# Altium PCB DAC_40MHz.PcbDoc
Units mil, origin at the board's own origin, x right, y up, seen from the top; angles counter-clockwise.
Board outline 3070.87 x 1850.39 mil, 2 copper layers (Top Layer, Bottom Layer); 57 components, 35 nets, 178 pads, 128 vias.
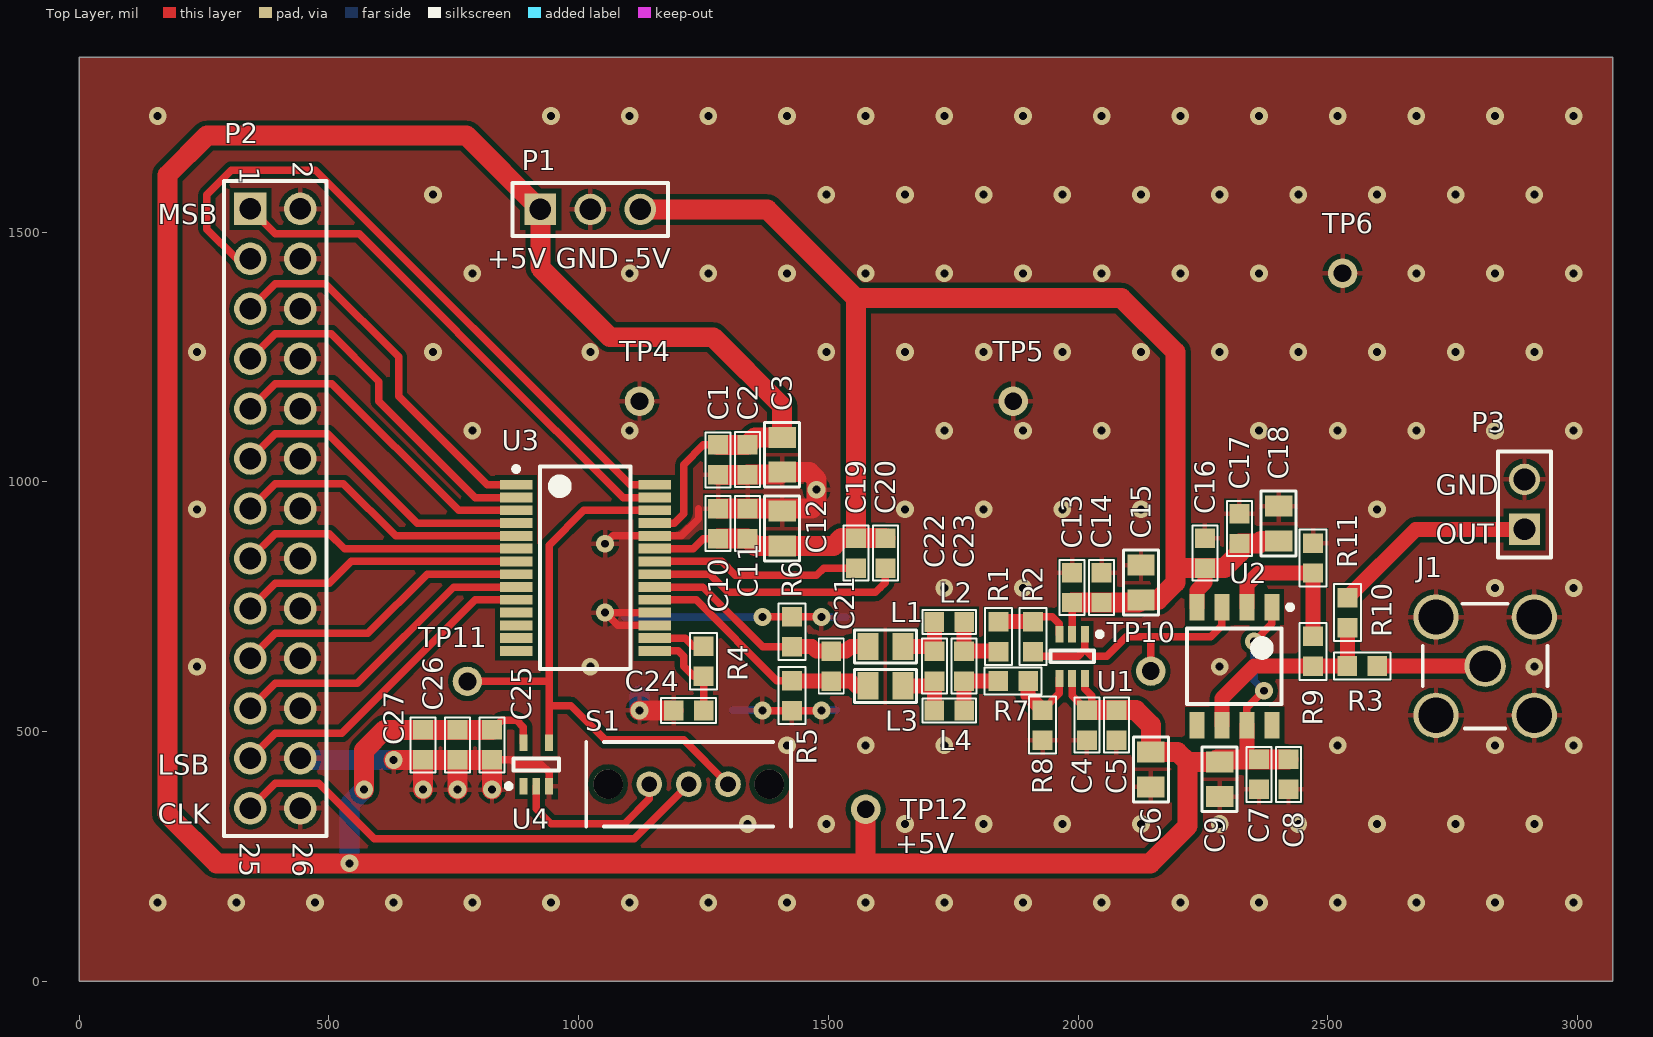
[diagram p0: Top Layer view]
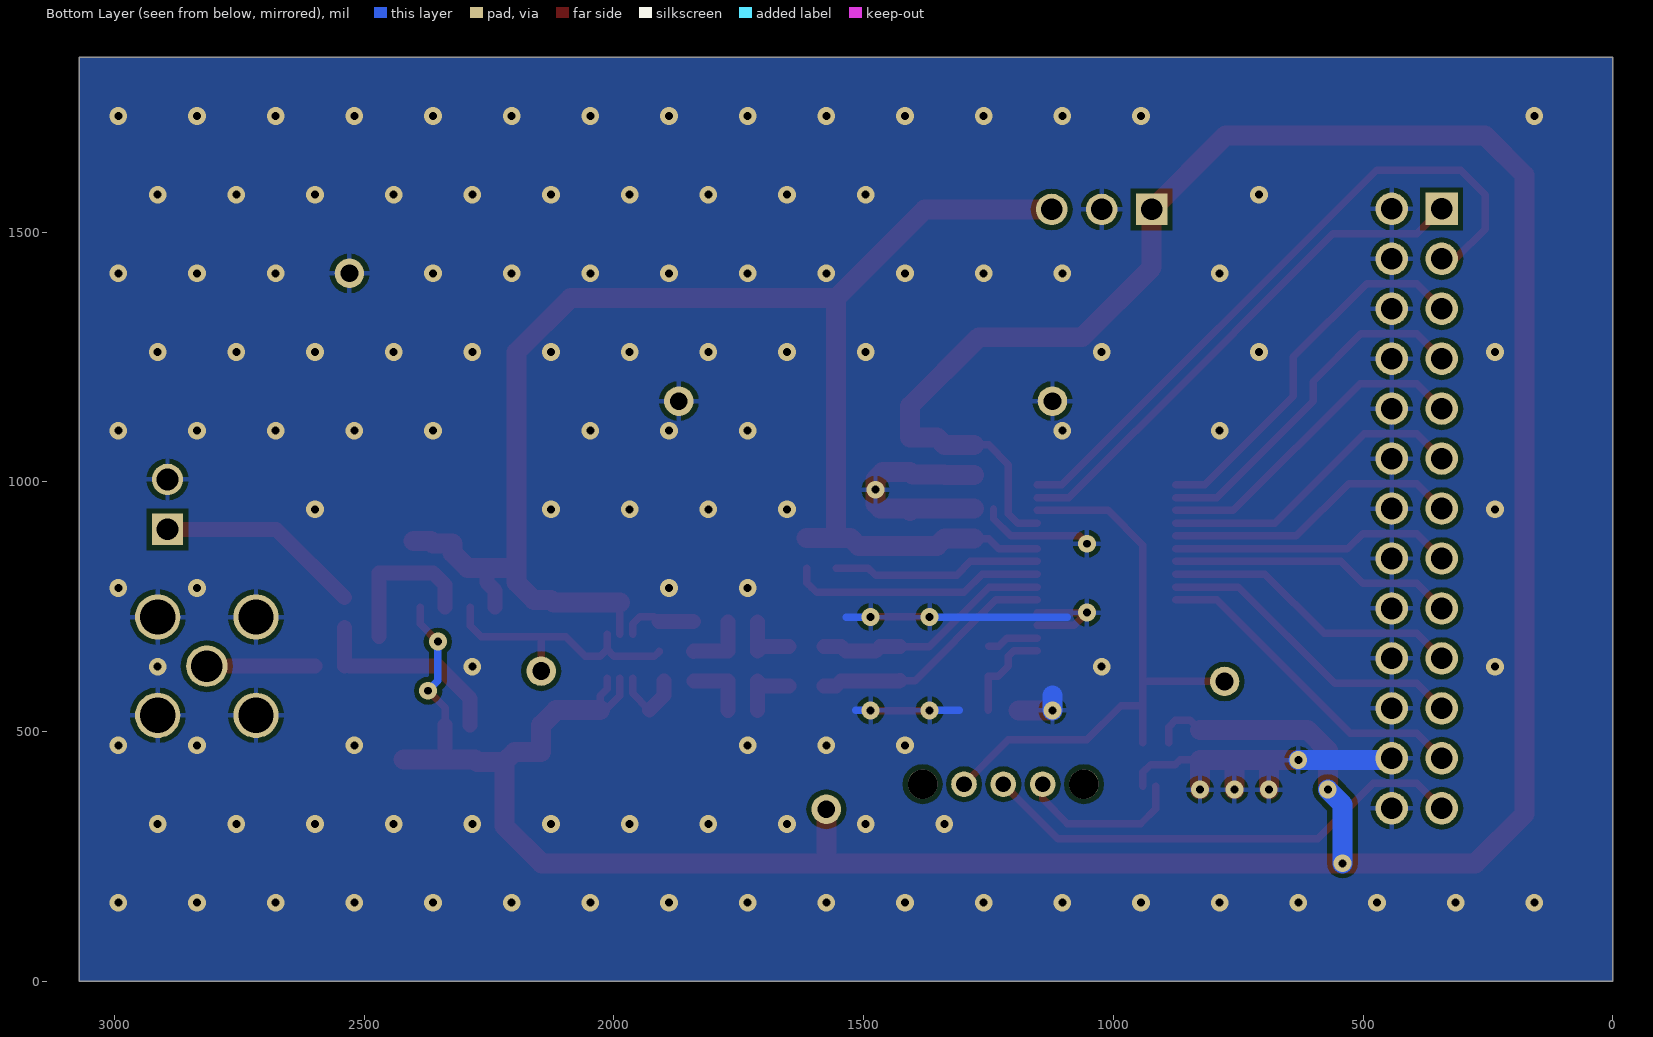
[diagram p1: Bottom Layer view, seen from below]
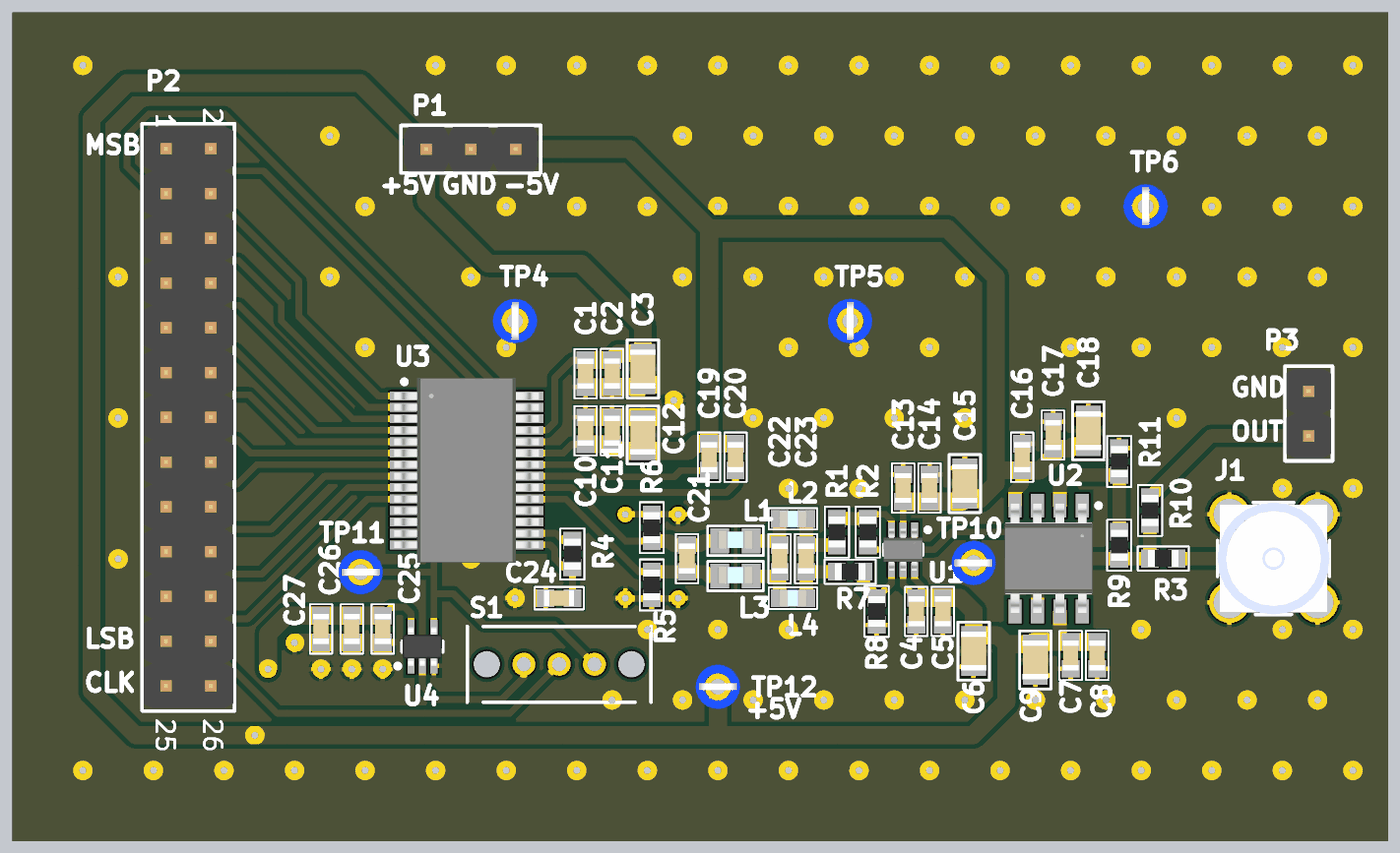
[diagram p2: 3D render of the assembled board from above, using the file's embedded part models]

## Layer stack, top to bottom
Top Solder: solder mask 0.4, Solder Resist, Dk 3.5
Top Layer: signal copper 1.4
Dielectric 1: dielectric 12.6, FR-4, Dk 4.8
Bottom Layer: signal copper 1.4
Bottom Solder: solder mask 0.4, Solder Resist, Dk 3.5

## Board outline
0,0 0,1850.39 3070.87,1850.39 3070.87,0

## Design rules (kind name [scope] priority, off if disabled: settings)
Clearance [All] p1: gap=10 ignorepadtopadclearanceinfootprint=TRUE except(0: Arc-Hole Track-Hole SMDPad-Hole THPad-Hole Via-Hole Fill-Hole Poly-Hole Region-Hole Text-Hole; 6: Arc-Arc Arc-Track Arc-SMDPad Track-Track Track-SMDPad SMDPad-SMDPad)
PolygonConnect [All] p1: connectstyle=Relief reliefconductorwidth=10 reliefentries=4 polygonreliefangle="90 Angle" airgapwidth=10
RoutingVias [All] p1: holewidth=15.75 width=35.43 viastyle="Through Hole" minholewidth=11.81 minwidth=31.5 maxholewidth=19.68 maxwidth=39.37
SolderMaskExpansion [All] p1: expansion=4
Width [All] p1: maxlimit=50 minlimit=6 preferedwidth=10 minimp=50.000000 maximp=50.000000 favimp=50.000000
30 further rules are at their usual default settings.

## Components (designator, comment, footprint, x,y, rotation, side; value= is the part's Value field where it differs from the comment)
C1 "Ceramic X5R" C_0603 1279.53,1043.83 r270 top value=100nF
C2 "Ceramic X5R" C_0603 1338.58,1044.3 r270 top value=1uF
C3 "Ceramic X5R" C_0805 1407.48,1054.14 r270 top value=10uF
C4 "Ceramic X5R" C_0603 2017.72,512.8 r270 top value=100nF
C5 "Ceramic X5R" C_0603 2076.77,512.8 r270 top value=1uF
C6 "Ceramic X5R" C_0805 2145.67,424.22 r270 top value=10uF
C7 "Ceramic X5R" C_0603 2362.2,414.38 r270 top value=100nF
C8 "Ceramic X5R" C_0603 2421.26,414.38 r270 top value=1uF
C9 "Ceramic X5R" C_0805 2283.46,404.53 r270 top value=10uF
C10 "Ceramic X5R" C_0603 1279.53,916.35 r270 top value=100nF
C11 "Ceramic X5R" C_0603 1338.58,916.35 r270 top value=1uF
C12 "Ceramic X5R" C_0805 1407.48,906.5 r270 top value=10uF
C13 "Ceramic X5R" C_0603 1988.19,788.39 r270 top value=100nF
C14 "Ceramic X5R" C_0603 2047.24,788.39 r270 top value=1uF
C15 "Ceramic X5R" C_0805 2125.98,798.24 r270 top value=10uF
C16 "Ceramic X5R" C_0603 2253.94,857.29 r270 top value=100nF
C17 "Ceramic X5R" C_0603 2322.83,906.5 r270 top value=1uF
C18 "Ceramic X5R" C_0805 2401.57,916.35 r270 top value=10uF
C19 "Ceramic X5R" C_0603 1555.12,857.29 r270 top value=100nF
C20 "Ceramic X5R" C_0603 1614.17,857.29 r270 top value=100nF
C21 "Ceramic C0G" C_0603 1505.91,630.91 r270 top value=56pF
C22 "Ceramic C0G" C_0603 1712.6,630.91 r270 top value=150pF
C23 "Ceramic C0G" C_0603 1771.65,630.91 r270 top value=150pF
C24 "Ceramic X5R" C_0603 1220.47,542.33 r180 top value=100nF
C25 "Ceramic X5R" C_0603 826.77,473.43 r270 top value=100nF
C26 "Ceramic X7R" C_0603 757.87,473.43 r270 top value=1nF
C27 "Ceramic X5R" C_0603 688.98,473.43 r270 top value=1uF
J1 "SMA vertical connector" J_SMA_VERTICAL 2814.96,630.91 r0 top value="=\"Manufacturer Part Number\""
L1 "Inductor" L_0805 1614.17,670.28 r0 top value=820nH
L2 "Inductor" L_0603 1742.13,719.5 r0 top value=1uH
L3 "Inductor" L_0805 1614.17,591.54 r0 top value=820nH
L4 "Inductor" L_0603 1742.13,542.33 r0 top value=1uH
P1 "Header 1x3, THT, 2,54mm" P_HEADER_1x3_THT_2.54_VERT 1023.62,1545.28 r0 top value="=\"Manufacturer Part Number\""
P2 "Header 2x13, THT, 2,54mm" P_HEADER_2x13_THT_2.54_VERT 392.91,946.46 r270 top value="=\"Manufacturer Part Number\""
P3 "Header 1x2, THT, 2,54mm" P_HEADER_1x2_THT_2.54_VERT 2893.7,954.72 r90 top value="=\"Manufacturer Part Number\""
R1 "Resistor" R_0603 1840.55,689.97 r90 top value=1k
R2 "Resistor" R_0603 1909.45,689.97 r270 top value=3.9k
R3 "Resistor" R_0603 2568.9,630.91 r0 top value=50R
R4 "Resistor" R_0603 1250,640.76 r270 top value=2k
R5 "Resistor" R_0603 1427.17,571.86 r90 top value=56R
R6 "Resistor" R_0603 1427.17,699.81 r270 top value=56R
R7 "Resistor" R_0603 1870.08,601.38 r0 top value=1k
R8 "Resistor" R_0603 1929.13,512.8 r270 top value=3.9k
R9 "Resistor" R_0603 2470.47,660.44 r270 top value=1k
R10 "Resistor" R_0603 2539.37,738.19 r270 top value=0R
R11 "Resistor" R_0603 2470.47,847.45 r270 top value=1k
S1 "Single Pole Double Throw Slideswitch" S_SLIDESWITCH_SPDT 1220.47,394.69 r0 top value=OS102011MS2QN13
TP4 "Single pin" TP_1PIN 1122.05,1161.42 r0 top value="=\"Manufacturer Part Number\""
TP5 "Single pin" TP_1PIN 1870.08,1161.42 r0 top value="=\"Manufacturer Part Number\""
TP6 "Single pin" TP_1PIN 2529.53,1417.32 r0 top value="=\"Manufacturer Part Number\""
TP10 "Single pin" TP_1PIN 2145.67,621.07 r90 top value="=\"Manufacturer Part Number\""
TP11 "Single pin" TP_1PIN 777.56,600.39 r90 top value="=\"Manufacturer Part Number\""
TP12 "Single pin" TP_1PIN 1574.8,344.49 r90 top value="=\"Manufacturer Part Number\""
U1 "ADA4807" SC70-6_TSSOP6_2X1.25_MD 1988.19,650.6 r270 top
U2 "LT1809" S8_SOP8_SOIC8_SO8_4.9X3.9_MD 2312.99,630.91 r270 top
U3 "LTC1666" SSOP28_SOP28_SO28_SOIC8_10.2X5.29_MD 1013.78,827.76 r0 top
U4 "74AHC1G14" SOT23-5_2.05X2.13_MD 915.35,434.06 r90 top

## Footprints (in the part's own frame and the unit in brackets; to place one, negate y for a bottom-side part, rotate by r counter-clockwise, add the part's x,y. Pads: shape width x height; smd on the part's side, far side on the other; paste and mask are expansions set on the pad)
C_0603 [mil]
  rect 39x40 smd: 1(-30,0) 2(30,0)
  silkscreen extent -55,-25 55,25, body extent -33,-18 33,18, height 35
C_0805 [mil]
  rect 42x55 smd: 1(-35,0) 2(35,0)
  silkscreen extent -65,-35 65,35, body extent -43,-29 43,29, height 53
J_SMA_VERTICAL [mm] "Vertical SMA coaxial connector"
  round 2.1 hole 1.6: 1(0,0)
  round 2.3 hole 1.8: 2(-2.5,-2.5) 2(-2.5,2.5) 2(2.5,-2.5) 2(2.5,2.5)
  silkscreen extent -3.17,-3.17 3.17,3.17, body extent -3.17,-3.17 3.18,3.18, height 9.5
L_0603 [mil]
  rect 39x40 smd: 1(-30,0) 2(30,0)
  silkscreen extent -54,-24 54,24, body extent -31,-20 32,20, height 31
L_0805 [mil]
  rect 42x55 smd: 1(-35,0) 2(35,0)
  silkscreen extent -62,-33 62,33, body extent -39,-18 39,23, height 50
P_HEADER_1x2_THT_2.54_VERT [mm]
  rect 1.6x1.6 hole 1.1: 1(-1.27,0)
  round 1.6 hole 1.1: 2(1.27,0)
  silkscreen extent -2.69,-1.35 2.69,1.35, body extent -2.54,-1.27 2.54,1.27, height 8.57
P_HEADER_1x3_THT_2.54_VERT [mm]
  rect 1.6x1.6 hole 1.1: 1(-2.54,0)
  round 1.6 hole 1.1: 2(0,0) 3(2.54,0)
  silkscreen extent -3.96,-1.35 3.96,1.35, body extent -3.81,-1.27 3.81,1.27, height 8.57
P_HEADER_2x13_THT_2.54_VERT [mm]
  rect 1.65x1.65 hole 1.1: 1(-15.24,-1.27)
  round 1.65 hole 1.1: 2(-15.24,1.27) 3(-12.7,-1.27) 4(-12.7,1.27) 5(-10.16,-1.27) 6(-10.16,1.27) 7(-7.62,-1.27) 8(-7.62,1.27) 9(-5.08,-1.27) 10(-5.08,1.27) 11(-2.54,-1.27) 12(-2.54,1.27) 13(0,-1.27) 14(0,1.27) 15(2.54,-1.27) 16(2.54,1.27) 17(5.08,-1.27) 18(5.08,1.27) 19(7.62,-1.27) 20(7.62,1.27) 21(10.16,-1.27) 22(10.16,1.27) 23(12.7,-1.27) 24(12.7,1.27) 25(15.24,-1.27) 26(15.24,1.27)
  silkscreen extent -16.66,-2.62 16.66,2.62, body extent -16.51,-2.54 16.51,2.54, height 8.59
R_0603 [mil]
  rect 39x40 smd: 1(-30,0) 2(30,0)
  silkscreen extent -57,-27 57,27, body extent -34,-19 34,19, height 21
S8_SOP8_SOIC8_SO8_4.9X3.9_MD [mm] "SOP, 8-Leads, Body 4,90x3,90mm, Pitch 1,27mm, IPC Medium Density"
  rect 1.35x0.75 smd: 1(-3,1.905) 2(-3,0.635) 3(-3,-0.635) 4(-3,-1.905) 5(3,-1.905) 6(3,-0.635) 7(3,0.635) 8(3,1.905)
  silkscreen extent -3.12,-2.4 1.92,2.96, body extent -3.1,-2.5 3.1,2.5, height 1.76
S_SLIDESWITCH_SPDT [mm]
  round 1.3 hole 0.8: 1(-2,0) 2(0,0) 3(2,0)
  round 1.5 hole 1.5 unplated: 4(-4.1,0) 4(4.1,0)
  silkscreen extent -5.21,-2.15 5.21,2.15
SC70-6_TSSOP6_2X1.25_MD [mm] "TSOP, 6-Leads, Body 2,00x1,25mm, Pitch 0,65mm, IPC Medium Density"
  rect 0.85x0.4 smd: 1(-1.125,0.65) 2(-1.125,0) 3(-1.125,-0.65) 4(1.125,-0.65) 5(1.125,0) 6(1.125,0.65)
  silkscreen extent -1.25,-1.1 0.3,1.53, body extent -1.19,-1.1 1.19,1.11, height 1.1
SOT23-5_2.05X2.13_MD [mm] "SOT23, 5-Leads, Body 2,05x2,13mm, Pitch 0,65mm, IPC Medium Density"
  rect 0.85x0.4 smd: 1(-1.1,0.65) 2(-1.1,0) 3(-1.1,-0.65) 4(1.1,-0.65) 5(1.1,0.65)
  silkscreen extent -1.22,-1.15 0.3,1.52, body extent -1.1,-1.12 1.1,1.12, height 1.1
SSOP28_SOP28_SO28_SOIC8_10.2X5.29_MD [mm] "SOP, 28-Leads, Body 10,20x5,29mm, Pitch 0,65mm, IPC Medium Density"
  rect 1.65x0.5 smd: 1(-3.525,4.225) 2(-3.525,3.575) 3(-3.525,2.925) 4(-3.525,2.275) 5(-3.525,1.625) 6(-3.525,0.975) 7(-3.525,0.325) 8(-3.525,-0.325) 9(-3.525,-0.975) 10(-3.525,-1.625) 11(-3.525,-2.275) 12(-3.525,-2.925) 13(-3.525,-3.575) 14(-3.525,-4.225) 15(3.525,-4.225) 16(3.525,-3.575) 17(3.525,-2.925) 18(3.525,-2.275) 19(3.525,-1.625) 20(3.525,-0.975) 21(3.525,-0.325) 22(3.525,0.325) 23(3.525,0.975) 24(3.525,1.625) 25(3.525,2.275) 26(3.525,2.925) 27(3.525,3.575) 28(3.525,4.225)
  silkscreen extent -3.65,-5.15 2.3,5.15, body extent -4.1,-5.24 4.1,5.25, height 1.7
TP_1PIN [mm] "Testpoint; 1 Pin;"
  round 1.5 hole 0.9: 1(0,0)
  body extent -1.27,-1.27 1.27,1.27, height 4.89

## Part data
C1 C4 C7 C10 C13 C16 C19 C20 C24 C25: library part C_100nF_16V_X5R_0603_10, "Capacitor", Dielectric=X5R, Manufacturer=KEMET, Manufacturer Part Number=C0603C104K4PACTU, Tolerance=10%, Voltage=16V, HelpURL=http://www.farnell.com/datasheets/2750585.pdf?_ga=2.131384847.1622004241.1573469514-1370716462.1573297970, Part Number=C_100nF_16V_X5R_0603_10, SCH_Footprint=0603, Supplier 1=TME, Supplier 2="RS Components", Supplier 3=Farnell, Supplier 4=Mouser, Supplier 5=Digi-Key, Supplier Part Number 1=C0603C104K4PACTU, Supplier Part Number 3=2773120, Supplier Part Number 4=80-C0603C104K4P, Supplier Part Number 5=399-14941-1-ND
C2 C5 C8 C11 C14 C17 C27: library part C_1uF_10V_X5R_0603_10, "Capacitor", Dielectric=X5R, Manufacturer=KEMET, Manufacturer Part Number=C0603C105K8PACTU, Tolerance=10%, Voltage=10V, HelpURL=http://www.farnell.com/datasheets/2739653.pdf?_ga=2.68618001.1622004241.1573469514-1370716462.1573297970, Part Number=C_1uF_10V_X5R_0603_10, SCH_Footprint=0603, Supplier 1=TME, Supplier 2="RS Components", Supplier 3=Farnell, Supplier 4=Mouser, Supplier 5=Digi-Key, Supplier Part Number 3=9227776, Supplier Part Number 4=80-C0603C105K8P, Supplier Part Number 5=399-3118-1-ND
C3 C6 C9 C12 C15 C18: library part C_10uF_16V_X5R_0805_10, "Capacitor", Dielectric=X5R, Tolerance=10%, Voltage=16V, Part Number=C_10uF_16V_X5R_0805_10, SCH_Footprint=0805, Supplier 1=TME, Supplier 2="RS Components", Supplier 3=Farnell, Supplier 4=Mouser, Supplier 5=Digi-Key
C21: library part C_56pF_50V_C0G_0603_5, "Capacitor", Dielectric=C0G, Manufacturer=MULTICOMP, Manufacturer Part Number=MC0603N560J500CT, Tolerance=5%, Voltage=50V, HelpURL=http://www.farnell.com/datasheets/1870456.pdf?_ga=2.79548562.723038991.1573297970-1370716462.1573297970, Part Number=C_56pF_50V_C0G_0603_5, SCH_Footprint=0603, Supplier 1=TME, Supplier 2="RS Components", Supplier 3=Farnell, Supplier 4=Mouser, Supplier 5=Digi-Key, Supplier Part Number 3=1759063
C22 C23: library part C_150pF_50V_C0G_0603_5, "Capacitor", Dielectric=C0G, Manufacturer=KEMET, Manufacturer Part Number=C0603C151J5GACTU, Tolerance=5%, Voltage=50V, HelpURL=http://www.farnell.com/datasheets/2740964.pdf?_ga=2.103099776.1622004241.1573469514-1370716462.1573297970, Part Number=C_150pF_50V_C0G_0603_5, SCH_Footprint=0603, Supplier 1=TME, Supplier 2="RS Components", Supplier 3=Farnell, Supplier 4=Mouser, Supplier 5=Digi-Key, Supplier Part Number 3=1414615, Supplier Part Number 4=80-C0603C151J5G, Supplier Part Number 5=399-1063-1-ND
C26: library part C_1nF_50V_X7R_0603_10, "Capacitor", Dielectric=X7R, Manufacturer=MULTICOMP, Manufacturer Part Number=MCU0603R102KCT, Tolerance=10%, Voltage=50V, HelpURL=http://www.farnell.com/datasheets/2863930.pdf?_ga=2.60809645.1622004241.1573469514-1370716462.1573297970, Part Number=C_1nF_50V_X7R_0603_10, SCH_Footprint=0603, Supplier 1=TME, Supplier 2="RS Components", Supplier 3=Farnell, Supplier 4=Mouser, Supplier 5=Digi-Key, Supplier Part Number 3=9406174
J1: library part J_SMA_VERTICAL, Part Number=J_SMA_VERTICAL, SCH_Footprint=J_SMA_VERTICAL
L1 L3: library part L_820nH_180mA_0805, "Induction", Current=180mA, Manufacturer=MULTICOMP, Manufacturer Part Number=MCFT000127, Resistance=2.35R, HelpURL=http://www.farnell.com/datasheets/2861609.pdf?_ga=2.107285122.1622004241.1573469514-1370716462.1573297970, Part Number=L_820nH_180mA_0805, SCH_Footprint=0805, Supplier 1=TME, Supplier 2="RS Components", Supplier 3=Farnell, Supplier 4=Mouser, Supplier 5=Digi-Key, Supplier Part Number 3=1711846
L2 L4: library part L_1uH_100mA_0603, "Induction", Current=100mA, Manufacturer=BOURNS, Manufacturer Part Number=CS160808-1R0K, Resistance=500mR, HelpURL=http://www.farnell.com/datasheets/1727952.pdf?_ga=2.136259249.1622004241.1573469514-1370716462.1573297970, Part Number=L_1uH_100mA_0603, SCH_Footprint=0603, Supplier 1=TME, Supplier 2="RS Components", Supplier 3=Farnell, Supplier 4=Mouser, Supplier 5=Digi-Key, Supplier Part Number 3=2858948
P1: library part P_HEADER_1x3_THT_2.54_VERT, "Pin Header, THT, pitch 2.54mm, Single Row, Vertical, 3pin", Part Number=P_HEADER_1x3_THT_2.54_VERT, SCH_Footprint=P_HEADER_1x3_THT_2.54_VERT
P2: library part P_HEADER_2x13_THT_2.54_VERT, "Pin Header, THT, pitch 2.54mm, Dual Row, Vertical, 26pin", Part Number=P_HEADER_2x13_THT_2.54_VERT, SCH_Footprint=P_HEADER_2x13_THT_2.54_VERT
P3: library part P_HEADER_1x2_THT_2.54_VERT, "Pin Header, THT, pitch 2.54mm, Single Row, Vertical, 2pin", Part Number=P_HEADER_1x2_THT_2.54_VERT, SCH_Footprint=P_HEADER_1x2_THT_2.54_VERT
R1 R7 R9 R11: library part R_1k_0603_1, Manufacturer Part Number=MCWR06X1001FTL, Manufacturers=MULTICOMP, Power=100mW, Tolerance=1%, Voltage=50V, HelpURL=http://www.farnell.com/datasheets/2860681.pdf?_ga=2.62376492.1622004241.1573469514-1370716462.1573297970, Part Number=R_1k_0603_1, SCH_Footprint=0603, Supplier 1=TME, Supplier 2="RS Components", Supplier 3=Farnell, Supplier 4=Mouser, Supplier 5=Digi-Key, Supplier Part Number 3=2447272
R2 R8: library part R_3.9k_0603_1, Manufacturer Part Number=MCWR06X3901FTL, Manufacturers=MULTICOMP, Power=100mW, Tolerance=1%, Voltage=50V, HelpURL=http://www.farnell.com/datasheets/2860681.pdf?_ga=2.62376492.1622004241.1573469514-1370716462.1573297970, Part Number=R_3.9k_0603_1, SCH_Footprint=0603, Supplier 1=TME, Supplier 2="RS Components", Supplier 3=Farnell, Supplier 4=Mouser, Supplier 5=Digi-Key, Supplier Part Number 3=2447363
R3: library part R_50R_0603_1, Manufacturer Part Number=CRCW060350R0FKEA, Manufacturers=VISHAY, Power=100mW, Tolerance=1%, Voltage=75V, HelpURL=http://www.farnell.com/datasheets/2310790.pdf?_ga=2.127191693.1622004241.1573469514-1370716462.1573297970, Part Number=R_50R_0603_1, SCH_Footprint=0603, Supplier 1=TME, Supplier 2="RS Components", Supplier 3=Farnell, Supplier 4=Mouser, Supplier 5=Digi-Key, Supplier Part Number 3=2112878
R4: library part R_2k_0603_1, Power=100mW, Tolerance=1%, Voltage=50V, Part Number=R_2k_0603_1, SCH_Footprint=0603, Supplier 1=TME, Supplier 2="RS Components", Supplier 3=Farnell, Supplier 4=Mouser, Supplier 5=Digi-Key
R5 R6: library part R_56R_0603_1, Manufacturer Part Number=MCWF06P56R0FTL, Manufacturers=MULTICOMP, Power=100mW, Tolerance=1%, Voltage=50V, HelpURL=http://www.farnell.com/datasheets/2864032.pdf?_ga=2.132541966.1622004241.1573469514-1370716462.1573297970, Part Number=R_56R_0603_1, SCH_Footprint=0603, Supplier 1=TME, Supplier 2="RS Components", Supplier 3=Farnell, Supplier 4=Mouser, Supplier 5=Digi-Key, Supplier Part Number 3=2694086
R10: library part R_0R_0603_1, Power=100mW, Tolerance=1%, Voltage=50V, Part Number=R_0R_0603_1, SCH_Footprint=0603, Supplier 1=TME, Supplier 2="RS Components", Supplier 3=Farnell, Supplier 4=Mouser, Supplier 5=Digi-Key
S1: library part S_SLIDESWITCH_SPDT_OS102011MS2QN1, Manufacturer Part Number=OS102011MS2QN13, HelpURL=https://pl.mouser.com/datasheet/2/60/os-1382783.pdf, Part Number=S_SLIDESWITCH_SPDT_OS102011MS2QN1, SCH_Footprint=S_SPDT, Supplier 1=TME, Supplier 2="RS Components", Supplier 3=Farnell, Supplier 4=Mouser, Supplier 5=Digi-Key
TP4 TP5 TP6 TP10 TP11 TP12: library part TP_1PIN, "Testpoint", Component Type=Standard, Part Number=TP_1PIN, SCH_Footprint=Single, Supplier 1=TME, Supplier 2="RS Components", Supplier 3=Farnell, Supplier 4=Mouser, Supplier 5=Digi-Key
U1: library part U_ADA4807-1AKSZ-R2, Manufacturer="ANALOG DEVICES", HelpURL=https://www.analog.com/media/en/technical-documentation/data-sheets/ADA4807-1_4807-2_4807-4.pdf, Manufacturer Part Number=ADA4807, Part Number=U_ADA4807-1AKSZ-R2, SCH_Footprint=SC70-6, Supplier 1=TME, Supplier 2="RS Components", Supplier 3=Farnell, Supplier 4=Mouser, Supplier 5=Digi-Key
U2: library part U_LT1809CS8, Manufacturer="ANALOG DEVICES", HelpURL=https://www.analog.com/media/en/technical-documentation/data-sheets/180910fa.pdf, Manufacturer Part Number=LT1809, Part Number=U_LT1809CS8, SCH_Footprint=S8, Supplier 1=TME, Supplier 2="RS Components", Supplier 3=Farnell, Supplier 4=Mouser, Supplier 5=Digi-Key
U3: library part U_LTC1666, "12-bit 50Msps DAC", Manufacturer="ANALOG DEVICES", HelpURL=https://www.analog.com/media/en/technical-documentation/data-sheets/166678f.pdf, Manufacturer Part Number=LTC1666, Part Number=U_LTC1666, SCH_Footprint=SSOP28
U4: library part U_74AHC1G14, "Inverting Schmitt trigger", Manufacturer=NEXPERIA, HelpURL=http://www.farnell.com/datasheets/2014360.pdf?_ga=2.152704443.389134298.1573586833-761150148.1573586833, Manufacturer Part Number=74AHC1G14, Part Number=U_74AHC1G14, SCH_Footprint=TSSOP5

## Via types
v1: diameter 35.43, hole 15.75, Top Layer to Bottom Layer, 128 vias

## Nets (pads, with @x,y where several pads share a name; then routed paths per layer and width w, separated by ;. In a path a pad name is that pad's centre, name@x,y a point inside that pad or via, vN(x,y) a via of type N, cw(c..) or ccw(c..) an arc to the next point about the centre after c; other vN are vias at no path point)
+5V: C1.1 C2.1 C3.1 C4.1 C5.1 C6.1 C7.1 C8.1 C9.1 C25.1 C26.1 C27.1 P1.1 TP12.1 U1.5 U1.6 U2.1 U2.7 U3.25 U4.5 | length 7219.8
  Top Layer w15: C25.1 845.98,522.64 875.98,522.64 889.76,508.87 U4.5 ; U3.25 1191.93,917.33 1210.63,936.03 1210.63,1034.46 1250,1073.83 C1.1 ; U1.5 1988.19,571.86 2017.24,542.8 C4.1 2027.56,542.8 2027.56,571.86 2013.78,585.64 U1.6 ; U2.7 2337.99,547.64 v1(2372.05,581.7) ; v1(2352.36,680.13) 2387.99,715.76 U2.1
  Top Layer w30: U2.7 2337.99,448.9 C7.1@2342.52,444.38
  Top Layer w40: v1(570.87,383.86) 570.87,462.6 611.7,503.43 C27.1 C26.1 C25.1 ; C1.1 1338.11,1073.83 C2.1 1353.43,1089.14 C3.1 1407.48,1151.57 1269.68,1289.37 1062.99,1289.37 923.62,1428.74 P1.1 775.98,1692.91 255.91,1692.91 177.17,1614.17 177.17,334.65 275.59,236.22 v1(541.34,236.22) 1574.8,236.22 ; TP12.1 1574.8,236.22 ; C4.1@2027.56,542.8 C5.1 2115.67,542.8 2145.67,512.8 C6.1 2199.25,459.22 2218.94,439.53 ; C8.1 C7.1 2342.52,444.38 2278.46,444.38 2273.62,439.53 2218.94,439.53 ; 1574.8,236.22 2144.68,236.22 2218.94,310.48 2218.94,439.53
  Bottom Layer w15: v1(2352.36,680.13) 2352.36,601.39 v1(2372.05,581.7)
  Bottom Layer w40: v1(541.34,236.22) 541.34,354.33 v1(570.87,383.86)
-5V: C10.2 C11.2 C12.2 C13.2 C14.2 C15.2 C16.2 C17.2 C18.2 C19.1 C20.1 P1.3 U1.2 U2.4 U3.23 | length 3226.7
  Top Layer w15: U3.23 1229.33,866.15 1249.53,886.35 C10.2 ; U1.2 C13.2
  Top Layer w30: U2.4 2237.99,782.29 2253.94,798.24 C16.2
  Top Layer w40: P1.3 1377.95,1545.28 1555.12,1368.11 ; C10.2 C11.2 1353.43,871.5 C12.2 1510.28,871.5 1526.06,887.29 C19.1 ; C20.1 C19.1 ; C13.2 C14.2 2121.14,758.39 C15.2 2159.88,763.24 2194.88,798.24 2194.88,827.76 ; C18.2 2366.57,881.35 2361.73,876.5 C17.2 2322.83,857.29 2292.83,827.29 C16.2 2253.46,827.76 2194.88,827.76 ; C19.1 1555.12,1368.11 ; 1555.12,1368.11 2086.61,1368.11 2194.88,1259.84 2194.88,827.76
CLK: P2.25 S1.2 | length 989.5
  Top Layer w15: P2.25 392.89,396.44 480.14,396.44 591.14,285.43 1111.21,285.43 S1.2
CLK_DAC: S1.3 TP11.1 U3.26 U4.4 | length 1223.1
  Top Layer w15: TP11.1 940.95,600.39 ; U4.4 940.95,552.17 ; U3.26 1010.83,942.92 940.95,873.04 940.95,600.39 ; S1.3 1210.63,483.27 1053.15,483.27 984.25,552.17 940.95,552.17 ; 940.95,552.17 940.95,600.39
DB0: P2.23 U3.10 | length 663.5
  Top Layer w15: P2.23 392.93,496.48 526,496.48 793.31,763.79 U3.10
DB1: P2.21 U3.9 | length 632.7
  Top Layer w15: P2.21 392.93,596.48 557.11,596.48 750.01,789.38 U3.9
DB2: P2.19 U3.8 | length 601.9
  Top Layer w15: P2.19 392.93,696.48 578.37,696.48 696.86,814.97 U3.8
DB3: P2.17 U3.7 | length 571.1
  Top Layer w15: P2.17 392.93,796.48 501.2,796.48 545.28,840.56 U3.7
DB4: P2.15 U3.6 | length 565.3
  Top Layer w15: P2.15 392.89,896.44 501.2,896.44 531.49,866.15 U3.6
DB5: P2.13 U3.5 | length 596.2
  Top Layer w15: P2.13 392.89,996.44 529.15,996.44 633.85,891.74 U3.5
DB6: P2.11 U3.4 | length 627
  Top Layer w15: P2.11 392.89,1096.44 498.05,1096.44 677.16,917.33 U3.4
DB7: P2.9 U3.3 | length 657.8
  Top Layer w15: P2.9 392.89,1196.44 506.32,1196.44 759.84,942.92 U3.3
DB8: P2.7 U3.2 | length 711.7
  Top Layer w15: P2.7 392.89,1296.44 504.74,1296.44 600.39,1200.79 600.39,1161.42 793.3,968.51 U3.2
DB9: P2.5 U3.1 | length 765.6
  Top Layer w15: P2.5 392.89,1396.44 493.33,1396.44 639.76,1250 639.76,1171.26 816.92,994.1 U3.1
DB10: P2.3 U3.28 | length 1358.5
  Top Layer w15: P2.3 315.35,1446.46 255.91,1505.91 255.91,1574.8 305.12,1624.02 473.43,1624.02 1103.35,994.1 U3.28
DB11: P2.1 U3.27 | length 1049
  Top Layer w15: P2.1 392.93,1496.44 560.65,1496.44 954.72,1102.36 955.72,1102.36 1089.57,968.51 U3.27
GND: C1.2 C2.2 C3.2 C4.2 C5.2 C6.2 C7.2 C8.2 C9.2 C10.1 C11.1 C12.1 C13.1 C14.1 C15.1 C16.1 C17.1 C18.1 C24.2 C25.2 C26.2 C27.2 J1.2 P1.2 P2.2 P2.4 P2.6 P2.8 P2.10 P2.12 P2.14 P2.16 P2.18 P2.20 P2.22 P2.24 P2.26 P3.2 R5.1 R6.1 R8.2 R11.1 TP4.1 TP5.1 TP6.1 U3.17 U3.18 U3.24 U4.3 | length 2363.4
  Top Layer w15: C25.2 866.61,443.43 875.98,434.06 925.2,434.06 940.95,418.31 U4.3 ; v1(1053.15,875.98) 1068.9,891.74 U3.24 1205.71,891.74 1240.16,926.19 1240.16,945.87 ; U3.17 1078.73,712.61 v1(1053.15,738.19) U3.18 ; v1(1368.11,542.33) 1368.58,541.86 R5.1 1485.75,541.86 v1(1486.22,542.33) ; v1(1368.11,729.34) 1368.58,729.81 R6.1 1485.75,729.81 v1(1486.22,729.34)
  Top Layer w40: v1(629.92,442.91) 630.44,443.43 C27.2 ; v1(688.98,383.86) C27.2 ; v1(757.87,383.86) C26.2 ; v1(826.77,383.86) C25.2 C26.2 ; v1(1122.05,542.33) C24.2 ; C10.1 C11.1 C12.1@1402.64,946.35 ; C1.2 1338.11,1013.83 C2.2 1402.64,1014.3 C3.2 1462.17,1019.14 1476.38,1004.93 v1(1476.38,984.25) 1476.38,955.72 1467.01,946.35 C12.1@1402.64,946.35 ; C12.1 C12.1@1402.64,946.35 ; C27.2 C26.2
  Bottom Layer w15: 1092.52,729.34 v1(1368.11,729.34) ; 1309.06,542.33 v1(1368.11,542.33) ; v1(1486.22,542.33) 1515.75,542.33 ; v1(1486.22,729.34) 1535.43,729.34
  Bottom Layer w40: P2.24 446.46,442.91 v1(629.92,442.91) ; v1(1122.05,542.33) 1122.05,571.86
  other v1: 157.48,157.48 314.96,157.48 472.44,157.48 629.92,157.48 787.4,157.48 944.88,157.48 1102.36,157.48 1259.84,157.48 1417.32,157.48 1574.8,157.48 1732.28,157.48 1889.76,157.48 2047.24,157.48 2204.72,157.48 2362.2,157.48 2519.68,157.48 2677.17,157.48 2834.65,157.48 2992.13,157.48 1338.58,314.96 1496.06,314.96 1653.54,314.96 1811.02,314.96 1968.5,314.96 2125.98,314.96 2283.46,314.96 2440.94,314.96 2598.42,314.96 2755.91,314.96 2913.39,314.96 1417.32,472.44 1574.8,472.44 1732.28,472.44 2519.68,472.44 2834.65,472.44 2992.13,472.44 236.22,629.92 1023.62,629.92 2283.46,629.92 2913.39,629.92 1732.28,787.4 1889.76,787.4 2834.65,787.4 2992.13,787.4 236.22,944.88 1653.54,944.88 1811.02,944.88 1968.5,944.88 2125.98,944.88 2598.42,944.88 787.4,1102.36 1102.36,1102.36 1732.28,1102.36 1889.76,1102.36 2047.24,1102.36 2362.2,1102.36 2519.68,1102.36 2677.17,1102.36 2834.65,1102.36 2992.13,1102.36 236.22,1259.84 708.66,1259.84 1023.62,1259.84 1496.06,1259.84 1653.54,1259.84 1811.02,1259.84 1968.5,1259.84 2125.98,1259.84 2283.46,1259.84 2440.94,1259.84 2598.42,1259.84 2755.91,1259.84 2913.39,1259.84 787.4,1417.32 1102.36,1417.32 1259.84,1417.32 1417.32,1417.32 1574.8,1417.32 1732.28,1417.32 1889.76,1417.32 2047.24,1417.32 2204.72,1417.32 2362.2,1417.32 2677.17,1417.32 2834.65,1417.32 2992.13,1417.32 708.66,1574.8 1496.06,1574.8 1653.54,1574.8 1811.02,1574.8 1968.5,1574.8 2125.98,1574.8 2283.46,1574.8 2440.94,1574.8 2598.42,1574.8 2755.91,1574.8 2913.39,1574.8 157.48,1732.28 944.88,1732.28 1102.36,1732.28 1259.84,1732.28 1417.32,1732.28 1574.8,1732.28 1732.28,1732.28 1889.76,1732.28 2047.24,1732.28 2204.72,1732.28 2362.2,1732.28 2519.68,1732.28 2677.17,1732.28 2834.65,1732.28 2992.13,1732.28
NetC19_2: C19.2 U3.22 | length 419.9
  Top Layer w15: U3.22 1286.42,840.56 1313.98,813 1476.38,813 1490.67,827.29 C19.2
NetC20_2: C20.2 U3.21 | length 513.9
  Top Layer w15: U3.21 1262.8,814.97 1299.21,778.55 1594.49,778.55 1604.33,788.39 1614.17,798.24 C20.2
NetC21_1: C21.1 L1.1 R6.2 U3.20 | length 483.7
  Top Layer w15: U3.20 1249.02,789.38 1368.58,669.81 R6.2
  Top Layer w30: R6.2 1467.01,669.81 1475.91,660.91 C21.1 1535.91,660.91 1545.28,670.28 L1.1
NetC21_2: C21.2 L3.1 R5.2 U3.19 | length 498
  Top Layer w15: U3.19 1235.24,763.79 1397.17,601.86 R5.2
  Top Layer w30: R5.2 1428.11,600.91 C21.2 1545.75,600.91 1555.12,591.54 L3.1
NetC22_1: C22.1 L1.2 L2.1 | length 125.4
  Top Layer w30: L1.2 1703.23,670.28 C22.1@1712.13,661.39 ; L2.1 C22.1@1712.13,661.39 ; C22.1 C22.1@1712.13,661.39
NetC22_2: C22.2 L3.2 L4.1 | length 126.1
  Top Layer w30: L3.2 1703.23,591.54 C22.2 1712.6,542.8 L4.1
NetC23_1: C23.1 L2.2 R1.1 | length 128.1
  Top Layer w30: L2.2 1772.13,661.38 C23.1 1839.61,660.91 R1.1
NetC23_2: C23.2 L4.2 R7.1 | length 127.4
  Top Layer w30: L4.2 1772.13,600.44 C23.2 1839.61,600.91 R7.1
NetC24_1: C24.1 R4.2 U3.15 | length 198.6
  Top Layer w15: U3.15 1199.8,661.42 1210.63,650.6 1210.63,630.91 1230.79,610.76 R4.2 1250.47,610.28 C24.1
NetJ1_1: J1.1 R3.2 | length 216.1
  Top Layer w30: R3.2 J1.1
NetP3_1: P3.1 R10.1 | length 410.9
  Top Layer w30: R10.1 2675.91,904.72 P3.1
NetR1_2: R1.2 R2.1 U1.3 | length 152.7
  Top Layer w15: R2.1 1919.29,729.81 1948.35,729.81 1962.6,715.56 U1.3
  Top Layer w30: R1.2 R2.1
NetR2_2: R2.2 TP10.1 U1.1 U2.3 | length 556.2
  Top Layer w15: R2.2@1909.45,660.44 R2.2 1918.82,650.6 2000,650.6 2013.78,664.38 ; U1.1 2013.78,664.38 ; TP10.1 2145.67,689.97 ; U2.3 2287.99,711.92 2266.04,689.97 2145.67,689.97 ; 2013.78,664.38 2027.56,650.6 2057.09,650.6 2096.46,689.97 2145.67,689.97
NetR3_1: R3.1 R9.2 R10.2 U2.6 | length 398.9
  Top Layer w30: U2.6 2287.99,566.54 2352.36,630.91 R3.1@2529.06,630.91 ; R3.1 2538.9,707.72 R10.2
NetR4_1: R4.1 U3.16 | length 104.2
  Top Layer w15: U3.16 1213.58,687.01 1229.84,670.76 R4.1
NetR7_2: R7.2 R8.1 U1.4 | length 148
  Top Layer w15: R8.1 1962.6,576.27 U1.4
  Top Layer w30: R7.2 1900.08,571.86 R8.1
NetR9_1: R9.1 R11.2 U2.2 | length 314
  Top Layer w30: U2.2 2337.99,793.71 2361.73,817.45 R11.2 R9.1
NetS1_1: S1.1 U4.2 | length 333.8
  Top Layer w15: U4.2 915.35,345.48 944.88,315.95 1092.52,315.95 1141.73,365.16 S1.1
pads on no net: S1.4 U2.5 U2.8 U3.11 U3.12 U3.13 U3.14 U4.1

## Polygon pours and split planes (outlines as drawn)
GND on Top Layer "TOP_GND" (solid, pour order 2): 0,0 0,1850.39 3070.87,1850.39 3070.87,0
GND on Bottom Layer "BOT_GND" (solid, pour order 3): 0,0 0,1850.39 3070.87,1850.39 3070.87,0

## Silkscreen, mask and mechanical layers (free items; w line width, h text height)
Top Overlay:
  text "MSB" at 157.48,1515.75 h40
  text "+5V" at 816.93,1427.17 h40
  text "GND" at 954.72,1427.17 h40
  text "-5V" at 1092.52,1427.17 h40
  text "GND" at 2716.54,974.41 h40
  text "OUT" at 2716.54,875.98 h40
  text "LSB" at 157.48,413.39 h40
  text "CLK" at 157.48,314.96 h40
  text "+5V" at 1633.86,255.91 h40
Mechanical 1:
  the board outline again, w7.87

## Text inside footprints (layer, text, board x,y; h text height)
C1: Mechanical 17 "d" at 1274.53,1078.83 h10 r270; Mechanical 19 "-" at 1274.53,1078.83 h10 r270
C2: Mechanical 17 "d" at 1333.58,1079.3 h10 r270; Mechanical 19 "-" at 1333.58,1079.3 h10 r270
C3: Mechanical 17 "d" at 1402.48,1099.14 h15 r270; Mechanical 19 "-" at 1402.48,1099.14 h15 r270
C4: Mechanical 17 "d" at 2012.72,547.8 h10 r270; Mechanical 19 "-" at 2012.72,547.8 h10 r270
C5: Mechanical 17 "d" at 2071.77,547.8 h10 r270; Mechanical 19 "-" at 2071.77,547.8 h10 r270
C6: Mechanical 17 "d" at 2140.67,469.22 h15 r270; Mechanical 19 "-" at 2140.67,469.22 h15 r270
C7: Mechanical 17 "d" at 2357.2,449.38 h10 r270; Mechanical 19 "-" at 2357.2,449.38 h10 r270
C8: Mechanical 17 "d" at 2416.26,449.38 h10 r270; Mechanical 19 "-" at 2416.26,449.38 h10 r270
C9: Mechanical 17 "d" at 2278.46,449.53 h15 r270; Mechanical 19 "-" at 2278.46,449.53 h15 r270
C10: Mechanical 17 "d" at 1274.53,951.35 h10 r270; Mechanical 19 "-" at 1274.53,951.35 h10 r270
C11: Mechanical 17 "d" at 1333.58,951.35 h10 r270; Mechanical 19 "-" at 1333.58,951.35 h10 r270
C12: Mechanical 17 "d" at 1402.48,951.5 h15 r270; Mechanical 19 "-" at 1402.48,951.5 h15 r270
C13: Mechanical 17 "d" at 1983.19,823.39 h10 r270; Mechanical 19 "-" at 1983.19,823.39 h10 r270
C14: Mechanical 17 "d" at 2042.24,823.39 h10 r270; Mechanical 19 "-" at 2042.24,823.39 h10 r270
C15: Mechanical 17 "d" at 2120.98,843.24 h15 r270; Mechanical 19 "-" at 2120.98,843.24 h15 r270
C16: Mechanical 17 "d" at 2248.94,892.29 h10 r270; Mechanical 19 "-" at 2248.94,892.29 h10 r270
C17: Mechanical 17 "d" at 2317.83,941.5 h10 r270; Mechanical 19 "-" at 2317.83,941.5 h10 r270
C18: Mechanical 17 "d" at 2396.57,961.35 h15 r270; Mechanical 19 "-" at 2396.57,961.35 h15 r270
C19: Mechanical 17 "d" at 1550.12,892.29 h10 r270; Mechanical 19 "-" at 1550.12,892.29 h10 r270
C20: Mechanical 17 "d" at 1609.17,892.29 h10 r270; Mechanical 19 "-" at 1609.17,892.29 h10 r270
C21: Mechanical 17 "d" at 1500.91,665.91 h10 r270; Mechanical 19 "-" at 1500.91,665.91 h10 r270
C22: Mechanical 17 "d" at 1707.6,665.91 h10 r270; Mechanical 19 "-" at 1707.6,665.91 h10 r270
C23: Mechanical 17 "d" at 1766.65,665.91 h10 r270; Mechanical 19 "-" at 1766.65,665.91 h10 r270
C24: Mechanical 17 "d" at 1255.47,547.33 h10 r180; Mechanical 19 "-" at 1255.47,547.33 h10 r180
C25: Mechanical 17 "d" at 821.77,508.43 h10 r270; Mechanical 19 "-" at 821.77,508.43 h10 r270
C26: Mechanical 17 "d" at 752.87,508.43 h10 r270; Mechanical 19 "-" at 752.87,508.43 h10 r270
C27: Mechanical 17 "d" at 683.98,508.43 h10 r270; Mechanical 19 "-" at 683.98,508.43 h10 r270
J1: Mechanical 17 "d" at 2709.96,605.91 h40; Mechanical 19 "-" at 2714.96,610.91 h40
L1: Mechanical 17 "d" at 1571.17,659.28 h10; Mechanical 19 "-" at 1571.17,659.28 h10
L2: Mechanical 17 "d" at 1702.13,704.5 h10; Mechanical 19 "-" at 1702.13,704.5 h10
L3: Mechanical 17 "d" at 1571.17,580.54 h10; Mechanical 19 "-" at 1571.17,580.54 h10
L4: Mechanical 17 "d" at 1702.13,527.33 h10; Mechanical 19 "-" at 1702.13,527.33 h10
P1: Mechanical 17 "d" at 858.62,1605.28 h40; Mechanical 19 "-" at 858.62,1605.28 h40
P2: Mechanical 17 "d" at 502.91,1611.46 h40 r270; Mechanical 19 "-" at 502.91,1611.46 h40 r270; Top Overlay "26" at 428.35,278.35 h40 r270; Top Overlay "25" at 322.05,278.35 h40 r270; Top Overlay "1" at 322.05,1630.32 h40 r270; Top Overlay "2" at 428.35,1642.13 h40 r270
P3: Mechanical 17 "d" at 2832.87,840.94 h40 r90; Mechanical 19 "-" at 2832.87,840.94 h40 r90
R1: Mechanical 17 "d" at 1835.55,659.97 h10 r90; Mechanical 19 "-" at 1855.55,659.97 h10 r90
R2: Mechanical 17 "d" at 1914.45,719.97 h10 r270; Mechanical 19 "-" at 1894.45,719.97 h10 r270
R3: Mechanical 17 "d" at 2538.9,635.91 h10; Mechanical 19 "-" at 2538.9,615.91 h10
R4: Mechanical 17 "d" at 1255,670.76 h10 r270; Mechanical 19 "-" at 1235,670.76 h10 r270
R5: Mechanical 17 "d" at 1422.17,541.86 h10 r90; Mechanical 19 "-" at 1442.17,541.86 h10 r90
R6: Mechanical 17 "d" at 1432.17,729.81 h10 r270; Mechanical 19 "-" at 1412.17,729.81 h10 r270
R7: Mechanical 17 "d" at 1840.08,606.38 h10; Mechanical 19 "-" at 1840.08,586.38 h10
R8: Mechanical 17 "d" at 1934.13,542.8 h10 r270; Mechanical 19 "-" at 1914.13,542.8 h10 r270
R9: Mechanical 17 "d" at 2475.47,690.44 h10 r270; Mechanical 19 "-" at 2455.47,690.44 h10 r270
R10: Mechanical 17 "d" at 2544.37,768.19 h10 r270; Mechanical 19 "-" at 2524.37,768.19 h10 r270
R11: Mechanical 17 "d" at 2475.47,877.45 h10 r270; Mechanical 19 "-" at 2455.47,877.45 h10 r270
S1: Mechanical 17 "d" at 1100.47,434.69 h20; Mechanical 19 "-" at 1100.47,434.69 h20
TP4: Mechanical 17 "d" at 1077.05,1201.42 h8; Mechanical 19 "-" at 1087.05,1116.42 h8
TP5: Mechanical 17 "d" at 1825.08,1201.42 h8; Mechanical 19 "-" at 1835.08,1116.42 h8
TP6: Mechanical 17 "d" at 2484.53,1457.32 h8; Mechanical 19 "-" at 2494.53,1372.32 h8
TP10: Mechanical 17 "d" at 2105.67,576.07 h8 r90; Mechanical 19 "-" at 2190.67,586.07 h8 r90
TP11: Mechanical 17 "d" at 737.56,555.39 h8 r90; Mechanical 19 "-" at 822.56,565.39 h8 r90
TP12: Mechanical 17 "d" at 1534.8,299.49 h8 r90; Mechanical 19 "-" at 1619.8,309.49 h8 r90
U1: Mechanical 17 "d" at 2027.56,729.34 h40 r270; Mechanical 19 "-" at 2027.56,729.34 h40 r270
U2: Mechanical 17 "d" at 2411.42,788.39 h40 r270; Mechanical 19 "-" at 2411.42,788.39 h40 r270
U3: Mechanical 17 "d" at 833.78,1042.76 h40; Mechanical 19 "-" at 833.78,1042.76 h40
U4: Mechanical 17 "d" at 905.35,414.06 h20 r90; Mechanical 19 "-" at 905.35,414.06 h20 r90